# Altium PCB PCB_床头灯_2022-02-08.pcbdoc
Units mm, origin at the board's own origin, x right, y up, seen from the top; angles counter-clockwise.
Board outline 117.85 x 41.75 mm, 2 copper layers (Top Layer, Bottom Layer); 46 components, 36 nets, 195 pads, 215 vias.
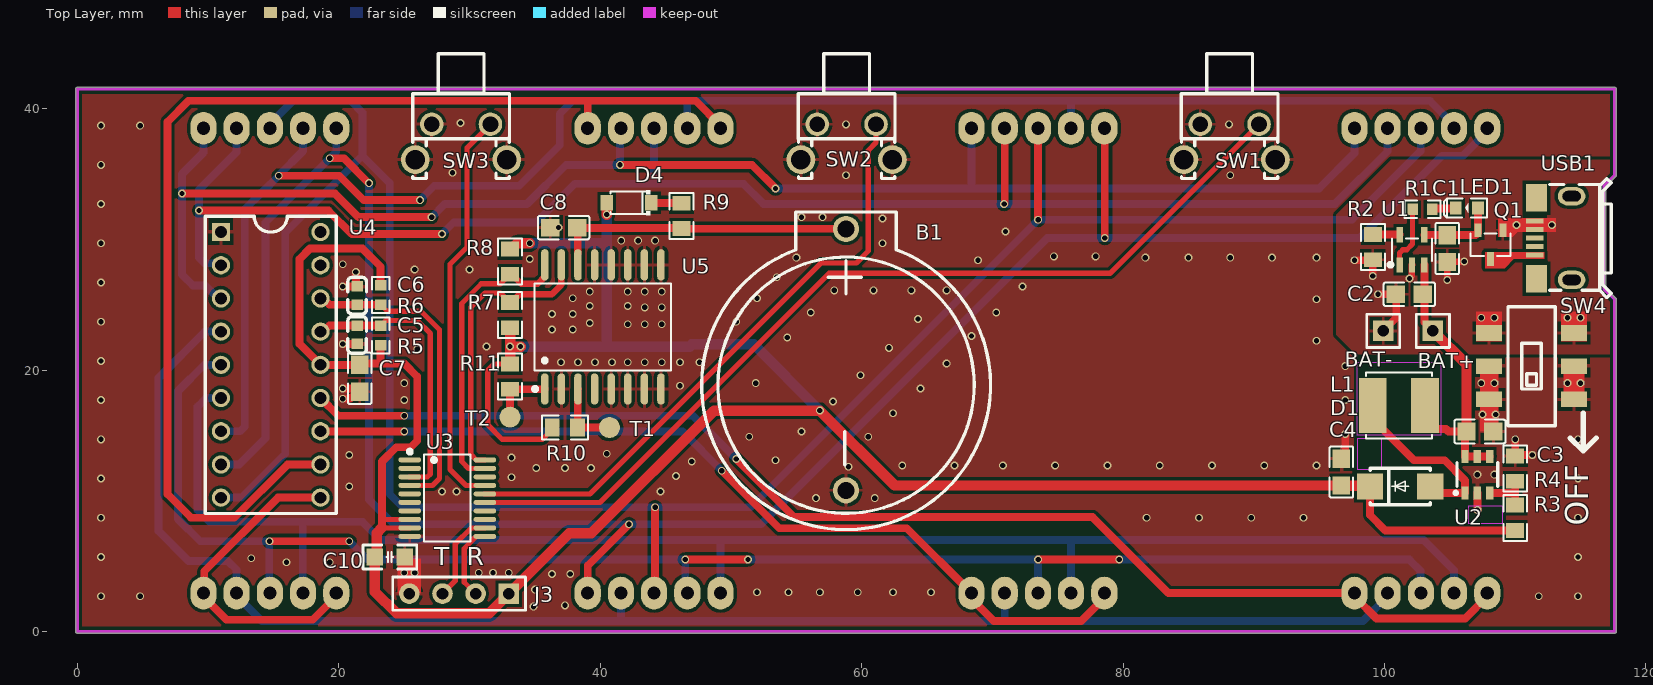
[diagram p0: Top Layer view]
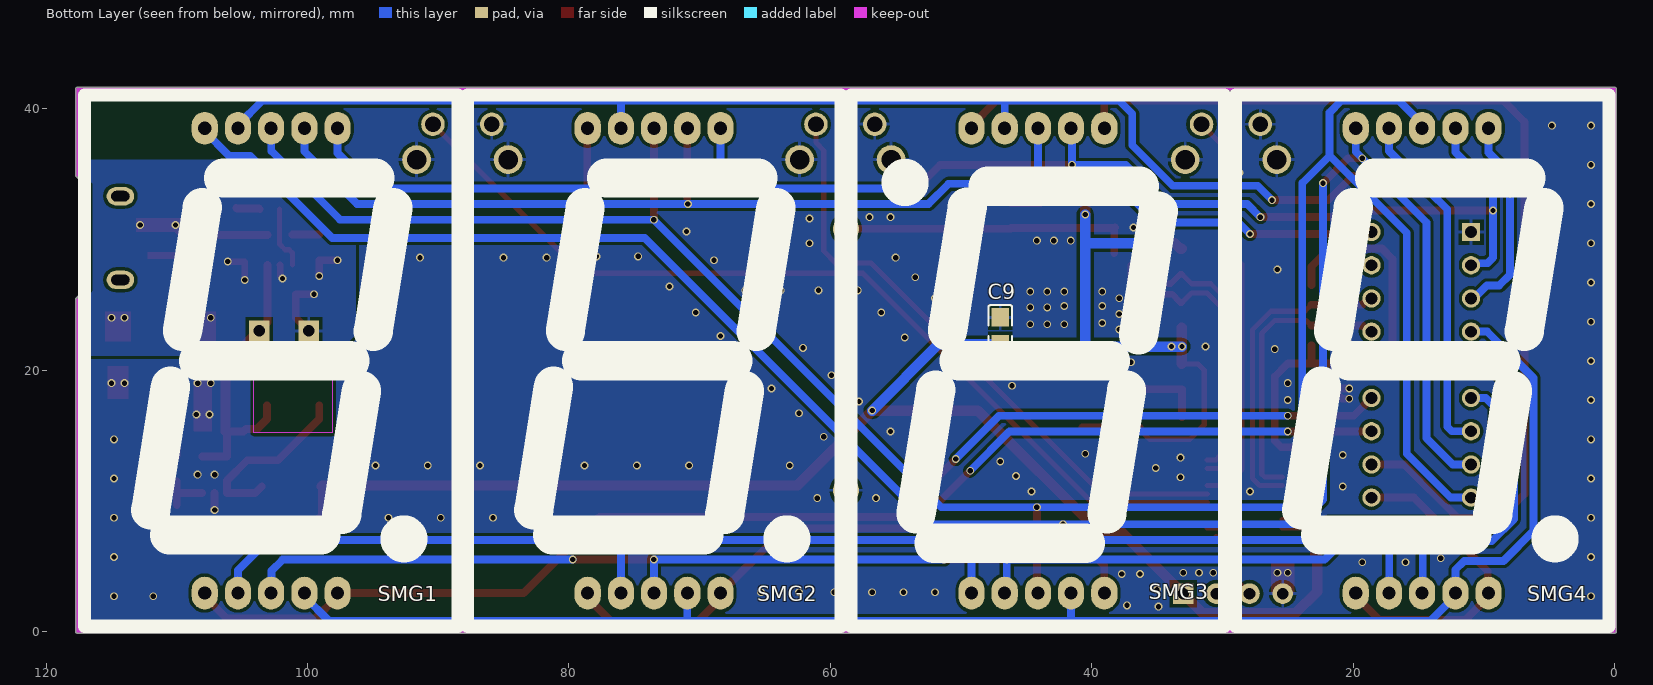
[diagram p1: Bottom Layer view, seen from below]

## Layer stack, top to bottom
Top Solder: solder mask 0.0102, Solder Resist, Dk 3.5
Top Layer: signal copper 0.0356
Dielectric1: dielectric 0.32, FR-4, Dk 4.8
Bottom Layer: signal copper 0.0356
Bottom Solder: solder mask 0.0102, Solder Resist, Dk 3.5

## Board outline
-0.127,0 -0.127,41.5 cw(c0,41.5) 0,41.627 117.6,41.627 cw(c117.6,41.5) 117.727,41.5 117.727,34.9 cw(c117.6,34.9) 117.69,34.81 116.927,34.047 116.927,26.253 117.69,25.49 cw(c117.6,25.4) 117.727,25.4 117.727,0 cw(c117.6,0) 117.6,-0.127 0,-0.127 cw(c0,0)

## Design rules (kind name [scope] priority, off if disabled: settings)
AssemblyTestPointUsage [All] p1 off:
AssemblyTestpoint [All] p1 off: testpointundercomponent=TRUE minsize=1.016 maxsize=2.54 preferedsize=1.524 minholesize=0 maxholesize=1.016 preferedholesize=0.813 testpointgrid=0.025 usegrid=TRUE gridtolerance=0 allowsidetop=TRUE allowsidebottom=TRUE
Clearance [All] p1: gap=0.25 ignorepadtopadclearanceinfootprint=FALSE
ComponentClearance [All] p1 off: gap=0.254 collisioncheckmode=3 verticalgap=0.254 showdistances=FALSE
DiffPairsRouting [All] p1 off: maxlimit=0.254 minlimit=0.254 mostfreqgap=0.254 toplayer_minwidth=0.381 toplayer_maxwidth=0.381 toplayer_prefwidth=0.381 bottomlayer_minwidth=0.381 bottomlayer_maxwidth=0.381 bottomlayer_prefwidth=0.381 maxuncoupledlength=12.7
FabricationTestPointUsage [All] p1 off: valid=0 allowmultiple=FALSE
FabricationTestpoint [All] p1 off: side=3 testpointundercomponent=TRUE minsize=1.016 maxsize=2.54 preferedsize=1.524 minholesize=0 maxholesize=1.016 preferedholesize=0.813 testpointgrid=0.025 allowsidetop=TRUE allowsidebottom=TRUE usegrid=TRUE gridtolerance=0
FanoutControl Fanout_BGA [IsBGA] p1 off: bgadir=Out bgaviamode=Centered fanoutstyle=Auto fanoutdirection=Alternating viagrid=0.025 // Fanout_BGA (Default Rule)
FanoutControl Fanout_LCC [IsLCC] p2 off: bgadir=Out bgaviamode=Centered fanoutstyle=Auto fanoutdirection=Alternating viagrid=0.025 // Fanout_LCC (Default Rule)
FanoutControl Fanout_SOIC [IsSOIC] p3 off: bgadir=Out bgaviamode=Centered fanoutstyle=Auto fanoutdirection=Alternating viagrid=0.025 // Fanout_SOIC (Default Rule)
FanoutControl Fanout_Small [(CompPinCount < 5)] p4 off: bgadir=Out bgaviamode=Centered fanoutstyle=Auto fanoutdirection=OutThenIn viagrid=0.025 // Fanout_Small (Default Rule)
FanoutControl Fanout_Default [All] p5 off: bgadir=Out bgaviamode=Centered fanoutstyle=Auto fanoutdirection=Alternating viagrid=0.025 // Fanout_Default (Default Rule)
Height [All] p1 off: minheight=0 maxheight=25.4 prefheight=12.7
HoleSize [All] p1 off: absolutevalues=TRUE maxlimit=2.54 minlimit=0.025 maxpercent=80.000 minpercent=20.000
HoleToHoleClearance [All] p1 off: gap=0.254 allowstackedmicrovias=TRUE
LayerPairs [All] p1 off: enforce=TRUE
MinimumSolderMaskSliver [All] p1 off: minsoldermaskwidth=0.254
NetAntennae [All] p1 off: netantennaetolerance=0
PasteMaskExpansion [All] p1 off: expansion=0
PlaneClearance [All] p1 off: clearance=0.508
PlaneConnect [All] p1 off: planeconnectstyle=Relief reliefexpansion=0.508 reliefentries=4 reliefconductorwidth=0.254 reliefairgap=0.254
PolygonConnect [All] p1: thpad.connectstyle=Relief thpad.reliefconductorwidth=0.254 thpad.reliefentries=4 thpad.polygonreliefangle="90 Angle" thpad.airgapwidth=0.254 smdpad.connectstyle=Relief smdpad.reliefconductorwidth=0.254 smdpad.reliefentries=4 smdpad.polygonreliefangle="90 Angle" smdpad.airgapwidth=0.254 via.connectstyle=Direct via.reliefconductorwidth=0.254 via.reliefentries=4 via.polygonreliefangle="90 Angle" via.airgapwidth=0.254
RoutingCorners [All] p1 off: cornerstyle=45-Degree minsetback=2.54 maxsetback=2.54
RoutingLayers [All] p1 off: top layer_v5=TRUE bottom layer_v5=TRUE
RoutingPriority [All] p1 off: routingpriority=0
RoutingTopology [All] p1 off: topology=Shortest
RoutingVias [All] p1: holewidth=0.4 width=0.6 viastyle="Through Hole" minholewidth=0.4 minwidth=0.6 maxholewidth=0.4 maxwidth=0.6
ShortCircuit [All] p1 off: allowed=FALSE
SilkToSilkClearance [All] p1 off: silktosilkclearance=0.254
SilkToSolderMaskClearance [IsPad] p1 off: minsilkscreentomaskgap=0.254 clearancetoexposedcopper=TRUE
SolderMaskExpansion [All] p1 off: expansion=0.102 istentingtop=FALSE
UnRoutedNet [All] p1 off:
UnpouredPolygon [All] p1 off:
Width [All] p1: maxlimit=1 minlimit=0.254 preferedwidth=0.6
1 further rules are at their usual default settings.

## Components (designator, comment, footprint, x,y, rotation, side; value= is the part's Value field where it differs from the comment)
B1 "CR2032-BS-2-1" BAT-TH_BS-2-1 58.8,20.8 r180 top
BAT+ "BAT+" HDR-M-2.54_1X1 103.7,23 r0 top (schematic designator J1)
BAT- "BAT-" HDR-M-2.54_1X1 99.9,23 r0 top (schematic designator J2)
C1 "4.7uf" C0805 104.8,29.3 r90 top
C2 "10uf" C0805 101.9,25.8 r0 top
C3 "22uF" C0805 107.3,15.3 r180 top
C4 "22uF" C0805 96.7,12.2 r270 top
C5 "101" C0603 21.4,22.7 r90 top
C6 "101" C0603 21.4,25.7 r90 top
C7 "104" C0805 21.6,19.37 r90 top
C8 "0.1u" C0805 37.2,30.9 r0 top
C9 "0.1u" C0805 47,23 r90 bottom
C10 "22uF" "C 0805_M" 23.9,5.7 r180 top
D1 "SS34" DO-214AC_L4.3-W2.7-LS5.3-RD 101.2,11.1 r0 top
D4 "1N4148W-T4" SOD-123_L2.8-W1.8-LS3.7-RD 42.2,32.8 r180 top
J3 "HDR-M-2.54_1x4" HDR-M-2.54_1X4 29.2,2.9 r180 top
L1 "10uH" IND-SMD_L5.0-W5.0 101.1,17.3 r180 top
LED1 "LED-0603_G" LED0603_GREEN 106.3,32.4 r180 top
Q1 "SI2307" SOT-23-3_L3.0-W1.7-P0.95-LS2.9-BR 108.1,29.6 r90 top
R1 "1k" R0603 102.9,32.3 r0 top
R2 "2k 1%" R0805 99.1,29.4 r90 top
R3 "2k2" R0805 110,8.7 r270 top
R4 "300" R0805 110,12.466 r90 top
R5 "10k" R0603 23.2,22.647 r270 top
R6 "10k" R0603 23.2,25.753 r90 top
R7 "10k" R0805 33.1,24.2 r90 top
R8 "10K" R0805 33.1,28.3 r90 top
R9 "200" R0805 46.2,31.8 r90 top
R10 "10K" R0805 37.3,15.6 r0 top
R11 "10K" R0805 33.1,19.5 r270 top
SMG1 "1.2寸1位" ?#1 102.78,20.72 r180 bottom
SMG2 "1.2寸1位" ?#1 73.48,20.72 r180 bottom
SMG3 "1.2寸1位" ?#1 44.12,20.72 r0 bottom
SMG4 "1.2寸1位" ?#1 14.72,20.72 r180 bottom
SW1 "SET" SW-TH_TC-1102N-C-QL-B 88.15,37.45 r180 top
SW2 "CHANGE" SW-TH_TC-1102N-C-QL-B 58.85,37.45 r180 top
SW3 "MODE" SW-TH_TC-1102N-C-QL-B 29.35,37.45 r180 top
SW4 "SS-3235S-L3" SW-SMD_SS-3235S-L3.00 111.25,20.3 r270 top
T1 "测试点1.2" ?#2 40.7,15.6 r180 top
T2 "测试点1.2" ?#2 33.1,16.4 r180 top
U1 "TP4054_C668215" SOT-23-5_L3.0-W1.7-P0.95-LS2.8-BL 102.1,29.2 r0 top
U2 "SX1308" SOT-23-6_L2.9-W1.6-P0.95-LS2.8-BR 107.1,12 r270 top
U3 "STC8H1K17-36I-TSSOP20" TSSOP-20_L6.5-W4.4-P0.65-LS6.4-BL 28.3,10.2 r270 top
U4 "TM1636" DIP18-2.54-22.8X7.62MM 14.79,20.4 r270 top
U5 "DS3231SN#" SOIC-16_L10.3-W7.5-P1.27-LS10.3-BL 40.2,23.3 r0 top
USB1 "U254-051T-4BH82-S2S" MICRO-USB-SMD_U254-051T-4BH82-S2S 112.9,30.1 r90 top

## Footprints (in the part's own frame and the unit in brackets; to place one, negate y for a bottom-side part, rotate by r counter-clockwise, add the part's x,y. Pads: shape width x height; smd on the part's side, far side on the other; paste and mask are expansions set on the pad)
BAT-TH_BS-2-1 [mm]
  round 2 hole 1.3: 1(0,-10) 2(0,10)
  silkscreen extent -11.05,-11.3 11.04,13
C0603 [mm]
  rect 0.8x0.9 smd: 1(-0.7,0) 2(0.7,0)
  silkscreen extent -1.41,-0.71 1.39,0.72
C0805 [mm]
  rect 1.41x1.35 smd: 1(-1.03,0) 2(1.03,0)
  silkscreen extent -1.96,-0.9 1.96,0.9
"C 0805_M" [mil] "无极性贴片电容"
  rect 50x50 smd: 1(-45,0) 2(45,0)
  silkscreen extent -81,-36 81,36, body extent -39,-24 39,24, height 20
DIP18-2.54-22.8X7.62MM [mm]
  rect 1.4x1.4 hole 0.899: 1(-10.16,-3.81)
  round 1.4 hole 0.899: 2(-7.62,-3.81) 3(-5.08,-3.81) 4(-2.54,-3.81) 5(0,-3.81) 6(2.54,-3.81) 7(5.08,-3.81) 8(7.62,-3.81) 9(10.16,-3.81) 10(10.16,3.81) 11(7.62,3.81) 12(5.08,3.81) 13(2.54,3.81) 14(0,3.81) 15(-2.54,3.81) 16(-5.08,3.81) 17(-7.62,3.81) 18(-10.16,3.81)
  silkscreen extent -11.38,-5 11.38,5
DO-214AC_L4.3-W2.7-LS5.3-RD [mm]
  rect 2x2 smd: 1(-2.3,0) 2(2.3,0)
  silkscreen extent -2.3,-1.4 2.3,1.4
HDR-M-2.54_1X1 [mil]
  rect 62x62 hole 35: 1(0,0)
  silkscreen extent -50,-50 50,50
HDR-M-2.54_1X4 [mil]
  rect 62x62 hole 35: 1(-150,0)
  round 62 hole 35: 2(-50,0) 3(50,0) 4(150,0)
  silkscreen extent -200,-50 200,50
IND-SMD_L5.0-W5.0 [mm]
  rect 2.124x4.22 smd: 1(2,0) 2(-2,0)
  silkscreen extent -2.53,-2.53 2.53,2.53
LED0603_GREEN [mm]
  rect 0.9x1 smd: 1(-0.85,0) 2(0.85,0)
  silkscreen extent -1.54,-0.73 1.75,0.73
MICRO-USB-SMD_U254-051T-4BH82-S2S [mm]
  rect 0.4x1.35 smd: 1(-1.3,1.413) 2(-0.65,1.413) 3(0,1.413) 4(0.65,1.413) 5(1.3,1.413)
  rect 2.1x1.6 smd: 6(3.1,1.288) 9(-3.1,1.288)
  oval 1.4x2.1 hole 0.8 slot 1.4 at 90 deg: 7(3.2,-1.412) 8(-3.2,-1.412)
  silkscreen extent -4.55,-4.44 4.55,0.26
R0603 [mm]
  rect 0.806x0.864 smd: 1(-0.753,0) 2(0.753,0)
  silkscreen extent -1.39,-0.66 1.39,0.66
R0805 [mm]
  rect 1.133x1.377 smd: 1(-0.966,0) 2(0.966,0)
  silkscreen extent -1.76,-0.92 1.76,0.92
SOD-123_L2.8-W1.8-LS3.7-RD [mm]
  rect 0.95x1.15 smd: 1(-1.693,0) 2(1.693,0)
  silkscreen extent -1.63,-0.94 1.41,0.94
SOIC-16_L10.3-W7.5-P1.27-LS10.3-BL [mm]
  oval 0.574x2.401 smd: 1(-4.445,-4.75) 2(-3.175,-4.75) 3(-1.905,-4.75) 4(-0.635,-4.75) 5(0.635,-4.75) 6(1.905,-4.75) 7(3.175,-4.75) 8(4.445,-4.75) 9(4.445,4.75) 10(3.175,4.75) 11(1.905,4.75) 12(0.635,4.75) 13(-0.635,4.75) 14(-1.905,4.75) 15(-3.175,4.75) 16(-4.445,4.75)
  silkscreen extent -5.33,-4.9 5.23,3.32
SOT-23-3_L3.0-W1.7-P0.95-LS2.9-BR [mm]
  rect 1.037x0.532 smd: 1(1.101,-0.95) 2(1.101,0.95) 3(-1.101,0)
  silkscreen extent -0.86,-1.53 0.86,1.53
SOT-23-5_L3.0-W1.7-P0.95-LS2.8-BL [mm]
  rect 0.49x1.157 smd: 1(-0.95,-1.154) 2(0,-1.154) 3(0.95,-1.154)
  rect 0.49x1.175 smd: 4(0.95,1.154) 5(-0.95,1.154)
  silkscreen extent -1.8,-1.29 1.53,0.85
SOT-23-6_L2.9-W1.6-P0.95-LS2.8-BR [mm]
  rect 1x0.55 smd: 1(1.4,-0.95) 2(1.4,0) 3(1.4,0.95) 4(-1.4,0.95) 5(-1.4,0) 6(-1.4,-0.95)
  silkscreen extent -0.9,-1.78 1.52,1.55
SW-SMD_SS-3235S-L3.00 [mm]
  rect 1.2x2 smd: 1(-2.54,3.25) 2(0,3.25) 3(2.54,3.25) 4(-2.54,-3.25) 5(0,-3.25) 6(2.54,-3.25)
  silkscreen extent -4.55,-1.8 4.55,1.8
SW-TH_TC-1102N-C-QL-B [mm]
  round 1.8 hole 1.2: 1(-2.25,-1.35) 2(2.25,-1.35)
  round 2.2 hole 1.5: 3(-3.5,1.35) 4(3.5,1.35)
  silkscreen extent -3.7,-6.75 3.7,2.79
TSSOP-20_L6.5-W4.4-P0.65-LS6.4-BL [mm]
  oval 0.364x1.742 smd: 1(-2.925,-2.871) 2(-2.275,-2.871) 3(-1.625,-2.871) 4(-0.975,-2.871) 5(-0.325,-2.871) 6(0.325,-2.871) 7(0.975,-2.871) 8(1.625,-2.871) 9(2.275,-2.871) 10(2.925,-2.871) 11(2.925,2.871) 12(2.275,2.871) 13(1.625,2.871) 14(0.975,2.871) 15(0.325,2.871) 16(-0.325,2.871) 17(-0.975,2.871) 18(-1.625,2.871) 19(-2.275,2.871) 20(-2.925,2.871)
  silkscreen extent -3.71,-3.02 3.33,1.77
?#1 [mm]
  oval 2x2.5 hole 1: 1(-5.08,-17.78) 2(-2.54,-17.78) 3(0,-17.78) 4(2.54,-17.78) 5(5.08,-17.78) 6(5.08,17.78) 7(2.54,17.78) 8(0,17.78) 9(-2.54,17.78) 10(-5.08,17.78)
  silkscreen extent -14.29,-20.32 14.29,20.32
?#2 [mm]
  round 1.6 smd: 1(0,0)

## Part data
B1: BOM_JLCPCB Part Class="Extended Part", BOM_Manufacturer=Q&J, BOM_Manufacturer Part=BS-2-1, BOM_Supplier=LCSC, BOM_Supplier Part=C70376, spicePre=B, spiceSymbolName=CR2032-BS-2-1
C3 C4 C10: BOM_JLCPCB Part Class="Extended Part", BOM_Manufacturer="Samsung Electro-Mechanics", BOM_Manufacturer Part=CL21A226MAYNNNE, BOM_Supplier=LCSC, BOM_Supplier Part=C602037, Contributor=LCSC, nameAlias=Capacitance, spicePre=C, spiceSymbolName=CL21A226MAYNNNE
D1: BOM_JLCPCB Part Class="Basic Part", BOM_Manufacturer=MDD, BOM_Manufacturer Part=SS34, BOM_Supplier=LCSC, BOM_Supplier Part=C8678, spicePre=D, spiceSymbolName=SS34_C8678
D4 Q1: BOM_JLCPCB Part Class="Extended Part", BOM_Manufacturer="Guangdong Hottech", BOM_Supplier=LCSC, Contributor=LCSC
  D4: BOM_Manufacturer Part=1N4148W-T4, BOM_Supplier Part=C181134, spicePre=D, spiceSymbolName=1N4148W-T4
  Q1: BOM_Manufacturer Part=SI2307, BOM_Supplier Part=C189813, spicePre=Q, spiceSymbolName=SI2307
L1: BOM_JLCPCB Part Class="Extended Part", BOM_Manufacturer="PROD Tech", BOM_Manufacturer Part=PSPNAQ5040-100M, BOM_Supplier=LCSC, BOM_Supplier Part=C436710, Contributor=LCSC, nameAlias=Inductance, spicePre=L, spiceSymbolName=PSPNAQ5040-100M
LED1: BOM_Manufacturer=EVERLIGHT(台湾亿光), BOM_Manufacturer Part=19-217/GHC-YR1S2/3T, BOM_Supplier=LCSC, BOM_Supplier Part=C72043, Contributor=LCEDA_Lib, spicePre=L, spiceSymbolName=LED-0603_G
SW1 SW2 SW3: BOM_JLCPCB Part Class="Extended Part", BOM_Manufacturer="XKB Enterprise", BOM_Manufacturer Part=TC-1102N-C-QL-B, BOM_Supplier=LCSC, BOM_Supplier Part=C406155, Contributor=LCSC, spicePre=S, spiceSymbolName=TC-1102N-C-QL-B
SW4: BOM_JLCPCB Part Class="Extended Part", BOM_Manufacturer="XKB Enterprise", BOM_Manufacturer Part=SS-3235S-L3, BOM_Supplier=LCSC, BOM_Supplier Part=C381098, Contributor=LCSC, spicePre=S, spiceSymbolName=SS-3235S-L3
U1: BOM_JLCPCB Part Class="Extended Part", BOM_Manufacturer="UMW(Youtai Semiconductor Co., Ltd.)", BOM_Manufacturer Part=TP4054, BOM_Supplier=LCSC, BOM_Supplier Part=C668215, Contributor=LCSC, spicePre=U, spiceSymbolName=TP4054_C668215
U2: BOM_JLCPCB Part Class="Extended Part", BOM_Manufacturer=SX, BOM_Manufacturer Part=SX1308, BOM_Supplier=LCSC, BOM_Supplier Part=C78162, sourceId=g4Yg9rJ1j, spicePre=U, spiceSymbolName=SX1308, timeStamp=1472247539
U3: BOM_JLCPCB Part Class="Extended Part", BOM_Manufacturer="STC Micro", BOM_Manufacturer Part=STC8H1K17-36I-TSSOP20, BOM_Supplier=LCSC, BOM_Supplier Part=C915675, Contributor=LCSC, spicePre=U, spiceSymbolName=STC8H1K17-36I-TSSOP20
U5: BOM_JLCPCB Part Class="Extended Part", BOM_Manufacturer=MAXIM, BOM_Manufacturer Part=DS3231SN, BOM_Supplier=LCSC, BOM_Supplier Part=C9866, image=http://image.lceda.cn/szlcsc/C9866.jpg, spicePre=U, spiceSymbolName=DS3231SN#, subpart_no=1, tags=Clock
USB1: BOM_JLCPCB Part Class="Extended Part", BOM_Manufacturer="XKB Connectivity(中国星坤)", BOM_Manufacturer Part=U254-051T-4BH82-S2S, BOM_Supplier=LCSC, BOM_Supplier Part=C908456, Contributor=LCSC, spicePre=U, spiceSymbolName=U254-051T-4BH82-S2S
BAT+ BAT-: BOM_Supplier=LCSC, BOM_Supplier Part=C81276, Contributor=LCEDA_Lib, spicePre=J, spiceSymbolName=HDR-M-2.54_1x1
C1 C2 C7 C8 C9: Contributor=LCEDA_Lib, nameAlias=Value(F), spicePre=C, spiceSymbolName=C_0805_US
C5 C6: Contributor=LCEDA_Lib, nameAlias=Value(F), spicePre=C, spiceSymbolName=C_0603_US
J3: BOM_Supplier=LCSC, BOM_Supplier Part=C124378, Contributor=LCEDA_Lib, spicePre=J, spiceSymbolName=HDR-M-2.54_1x4
R1 R5 R6: Contributor=LCEDA_Lib, nameAlias=Value(Ω), spicePre=R, spiceSymbolName=R_0603_US
R2 R3 R4 R7 R8 R9 R10 R11: Contributor=LCEDA_Lib, nameAlias=Value(Ω), spicePre=R, spiceSymbolName=R_0805_US
SMG1 SMG2 SMG3 SMG4: Contributor=gefyyg, spicePre=S, spiceSymbolName=1.2寸1位-10
T1 T2: BOM_Supplier Part=undefined, Contributor=Wang233_CN, spicePre=T, spiceSymbolName=测试点1.2, subpart_no=1
U4: BOM_Manufacturer Part=TM1636, sourceId=EwIigPpnz, spicePre=U, spiceSymbolName=TM1636, timeStamp=1448004853

## Via types
v1: diameter 0.6, hole 0.4, Top Layer to Bottom Layer, tented both sides, 212 vias
v2: diameter 0.6, hole 0.4, Top Layer to Bottom Layer, 3 vias

## Nets (pads, with @x,y where several pads share a name; then routed paths per layer and width w, separated by ;. In a path a pad name is that pad's centre, name@x,y a point inside that pad or via, vN(x,y) a via of type N, cw(c..) or ccw(c..) an arc to the next point about the centre after c; other vN are vias at no path point)
+5V: Q1.3 USB1.1
A: SMG1.7 SMG2.7 SMG3.3 SMG4.7 U4.2 | length 120.4
  Top Layer w0.6: v1(9.3,32.2) 19.2,32.2 21,30.4 v1(27.9,30.4) ; v1(70.9,32.7) 70.94,32.74 SMG2.7
  Bottom Layer w0.6: U4.2 10.827,28.173 9.727,28.173 9.3,28.6 9.3,33.8 12.18,36.68 SMG4.7 ; v1@27.918,30.418 28.8,31.3 35.1,31.3 38.05,34.25 44.1,34.25 50.95,34.25 52.5,32.7 v1(70.9,32.7) 96.2,32.7 100.24,36.74 SMG1.7 ; 44.1,34.3 44.1,38.48 SMG3.3
B: SMG1.6 SMG2.6 SMG3.2 SMG4.6 U4.3 | length 118.9
  Top Layer w0.6: v1(8,33.5) 19.7,33.5 21.5,31.7 v1(27.1,31.7) ; v1(41.5,35.7) 51.6,35.7 v1(53.4,33.9)
  Bottom Layer w0.6: SMG4.6 9.64,36.64 8,35 8,27.3 8.818,26.482 9.762,26.482 10.764,25.48 U4.3 ; v1(27.1,31.7) 28.1,32.7 34.4,32.7 37.4,35.7 v1(41.5,35.7) 41.5,38.42 SMG3.2 ; v1(53.4,33.9) 68.4,33.9 ; SMG2.6 68.4,33.9 ; SMG1.6 97.7,36.6 95,33.9 68.4,33.9
BAT+: BAT+.1 C2.2 C3.2 L1.2 U1.3 U2.4 U2.5 U2.6 | length 22.5
  Top Layer w0.6: U1.3 103.046,28.042 103.046,25.8 103.046,23.654 BAT+.1 ; L1.2 103.1,16.252 103.862,15.49 104.71,15.49 104.9,15.3 C3.2 106.15,15.18 U2.6 U2.5 U2.4
  Top Layer w0.8: BAT+.1 106.27,20.43 106.27,15.689 C3.2
BGND: BAT-.1 C1.1 C2.1 Q1.1 R2.1 SW4.1 SW4.4 U1.2 USB1.4 USB1.5 | length 11
  Top Layer w0.5: v1(101.9,27) 101.9,27.027 102.095,27.222 102.095,28.041 U1.2 ; v1(104.8,26.9) C1.1 104.815,28.285 106.085,28.285 v1(106.1,28.3)
  Top Layer w0.6: v1(97.7,28.4) 99.066,28.4 99.1,28.366 v1(99.1,27.2) ; v1(99.5,25.8) C2.1 100.9,25.77 100.9,24 BAT-.1
  other v1: 107.4,24 108.4,24 114,24 115,24 110.1,31.1 112.8,31.1
C: SMG1.4 SMG2.4 SMG3.9 SMG4.4 U4.4 | length 121.1
  Bottom Layer w0.6: U4.4 9.74,22.94 6.2,19.4 6.2,7.7 8.5,5.4 11.5,5.4 12.18,4.72 SMG4.4 12.18,2.72 14.1,0.8 41.6,0.8 98.35,0.8 100.24,2.69 SMG1.4 ; SMG3.9 41.58,0.92 41.6,0.9 ; 70.94,0.96 SMG2.4
D: SMG1.3 SMG2.3 SMG3.7 SMG4.3 U4.5 | length 121.5
  Top Layer w0.6: v1(14.7,6.9) v1(20.8,6.9) ; v1(46.5,5.5) v1(51.3,5.5) ; v1(73.5,5.5) v1(79.7,5.5)
  Bottom Layer w0.6: U4.5 9.7,20.4 7.7,18.4 7.7,8.6 9.4,6.9 v1(14.7,6.9) 14.672,6.872 14.672,2.989 SMG4.3 ; v1(20.8,6.9) 22.2,5.5 v1(46.5,5.5) 46.5,3.1 SMG3.7 ; v1(51.3,5.5) v1(73.5,5.5) 73.5,2.96 SMG2.3 ; v1(79.7,5.5) 101.9,5.5 102.752,4.648 102.752,2.968 SMG1.3
DP: SMG1.8 SMG2.8 SMG3.8 SMG4.8 U4.9 | length 176
  Top Layer w0.6: SMG3.8@44.2,3 v1(44.2,9.5) ; SMG2.8 73.48,31.52 v1(73.5,31.5)
  Bottom Layer w0.6: U4.9 12.54,10.24 15.9,13.6 15.9,30.5 21.8,36.4 ; SMG4.8 14.72,38.82 16.5,40.6 20.9,40.6 21.8,39.7 21.8,36.4 ; SMG1.8 102.772,38.492 102.772,36.772 97.5,31.5 v1(73.5,31.5) v1(73.5,31.5) 51.502,9.5 v1(44.2,9.5) 24.9,9.5 23.9,10.5 23.9,34.3 21.8,36.4
E: SMG1.2 SMG2.2 SMG3.6 SMG4.2 U4.6 | length 123.3
  Bottom Layer w0.6: U4.6 9.86,17.86 9.2,17.2 9.2,9.3 10.1,8.4 17.242,8.4 ; SMG4.2 17.242,2.959 17.242,8.4 ; SMG3.6 49.2,7 ; SMG2.2 76.02,7 ; SMG1.2 105.32,4.68 103,7 76.02,7 ; 17.242,8.4 21.8,8.4 23.2,7 49.2,7 ; 49.2,7 76.02,7
F: SMG1.9 SMG2.9 SMG3.4 SMG4.9 U4.7 | length 127.2
  Top Layer w0.6: v1(15.4,34.867) 20.033,34.867 21.9,33 v1(26.2,33)
  Bottom Layer w0.6: U4.7 12.449,15.32 12.8,15.671 12.8,32.3 14.083,33.583 14.117,33.583 v1(15.4,34.867) 15.4,34.9 17.26,36.76 SMG4.9 ; v1(26.2,33) 27.3,34.1 33.8,34.1 36.9,37.2 36.9,39.6 37.9,40.6 46.66,40.6 ; SMG3.4 46.66,40.6 ; SMG2.9 76.02,40.52 76.1,40.6 ; SMG1.9 105.32,38.75 103.47,40.6 76.1,40.6 ; 46.66,40.6 76.1,40.6
G: SMG1.10 SMG2.10 SMG3.10 SMG4.10 U4.8 | length 172.2
  Top Layer w0.6: v1(19.3,36.2) 20.4,36.2 v1(22.3,34.3) ; SMG3.10 39.04,5.04 v1(42.2,8.2) ; SMG2.10 78.6,38.46 v1(78.6,30.1)
  Bottom Layer w0.6: U4.8 12.38,12.78 14.4,14.8 14.4,31.3 v1(19.3,36.2) 19.8,36.7 SMG4.10 ; v1(22.3,34.3) 22.3,10.1 24.2,8.2 v1(42.2,8.2) 52.3,8.2 74.2,30.1 v1(78.6,30.1) 98.1,30.1 104.4,36.4 106,36.4 107.86,38.26 SMG1.10
G1: SMG1.1 SMG1.5 U4.13 | length 97
  Top Layer w0.6: U4.13 19.96,16.5 v1(25,16.5) ; v1(50.4,13.2) 54.85,8.75 77.652,8.75 83.462,2.94 SMG1.5 ; SMG1.5@97.8,2.69 97.8,2.59 99.39,1 106.17,1 107.86,2.69 SMG1.1
  Bottom Layer w0.6: v1(25,16.5) 47.1,16.5 v1(50.4,13.2)
G2: SMG2.1 SMG2.5 U4.12 | length 67.3
  Top Layer w0.6: U4.12 18.62,15.3 v1(25,15.3) ; v1(49.3,12.3) 53.7,7.9 63.44,7.9 SMG2.5 68.4,2.5 70.1,0.8 76.8,0.8 78.56,2.56 SMG2.1
  Bottom Layer w0.6: v1(25,15.3) 46.3,15.3 v1(49.3,12.3)
G3: SMG3.1 SMG3.5 U4.11 | length 88.7
  Top Layer w0.6: U4.11 16.08,12.78 12,8.7 8.7,8.7 6.9,10.5 6.9,39 8.5,40.6 39,40.6 ; SMG3.1 39.04,40.56 39,40.6 ; SMG3.5 49.2,38.7 47.3,40.6 39,40.6
G4: SMG4.1 SMG4.5 U4.10 | length 25.1
  Top Layer w0.6: U4.10 15.34,10.24 9.709,4.609 9.709,3.008 SMG4.5 9.64,2.66 11.4,0.9 18,0.9 19.8,2.7 SMG4.1
GND: B1.2 C3.1 C4.1 C5.1 C6.2 C7.1 C8.1 C9.2 C10.1 J3.4 R4.2 SW1.2 SW1.3 SW1.4 SW2.2 SW2.3 SW2.4 SW3.2 SW3.3 SW3.4 SW4.2 SW4.3 SW4.5 SW4.6 U2.2 U3.10 U4.1 U5.2 U5.5 U5.6 U5.7 U5.8 U5.9 U5.10 U5.11 U5.12 U5.13 | length 12.4
  Top Layer w0.6: v1(20.3,17.8) 20.874,17.8 21.009,17.935 21.225,17.935 21.6,18.31 C7.1 21.34,18.6 v1(20.3,18.6) ; v1(20.3,22) C5.1@21.4,22 ; v1(20.3,26.4) 21.4,26.4 21.3,26.5 v1(21.3,27.5) ; SW3.3@32.85,35.94 SW3.3 ; C4.1@96.77,13.3 C4.1 97,13.53 v1(97,15.1) ; v1(107.1,9.3) U2.2 ; v1(110,14.7) R4.2 110.067,13.5 v1(111.3,13.5)
  other v1: 34.9,1.9 37.3,2 1.8,2.7 4.8,2.7 111.8,2.7 114.8,2.7 52,3 54.4,3 56.8,3 59.7,3 62.4,3 65.3,3 35,3.2 36.3,4.4 37.7,4.4 25,4.5 25.8,4.5 30.7,4.5 31.8,4.5 33,4.5 16,5.3 19.3,5.3 13.3,5.6 1.8,5.7 114.8,5.7 1.8,8.7 81.8,8.7 85.8,8.7 89.8,8.7 93.8,8.7 114.8,8.7 56.5,10.2 61,10.2 27.9,10.7 29,10.7 44.6,10.7 20.8,11.1 1.8,11.7 114.8,11.7 33.2,11.8 45.8,11.9 107.1,12 108.4,12 35.1,12.5 37.3,12.5 39.3,12.5 59,12.6 63.1,12.7 67.1,12.7 70.8,12.7 74.8,12.7 78.8,12.7 82.8,12.7 86.8,12.7 90.8,12.7 94.8,12.7 47,13 53.4,13.1 33.2,13.3 20.8,13.5 40.5,13.6 1.8,14.7 114.8,14.7 51.4,14.9 60.5,14.9 55.4,15.3 107.5,16.6 108.5,16.6 62.4,16.7 57.8,17.6 1.8,17.7 25,17.7 97,17.7 64.5,18.6 46.1,18.8 25,19 51.9,19 107.4,19 108.4,19 114,19 115,19 59.9,19.6 97,20.3 66.5,20.5 37,20.6 38.3,20.6 39.6,20.6 40.9,20.6 42.1,20.6 43.4,20.6 44.7,20.6 46.1,20.6 47.6,20.6 1.8,20.7 26,21.6 62.1,21.7 31.3,21.8 94.8,22.24 54.3,22.5 68.4,22.6 36.3,23.1 37.9,23.1 42.1,23.5 43.4,23.5 44.7,23.5 39.2,23.6 1.8,23.7 50.4,23.7 64.3,23.9 36.3,24.3 37.9,24.3 56.1,24.4 70.3,24.4 43.4,24.8 44.7,24.8 39.2,24.9 42.1,24.9 94.8,25.42 37.9,25.5 52,25.5 39.2,26 42.1,26 43.4,26 44.7,26 57.9,26.1 60.9,26.1 63.8,26.1 66.5,26.1 72.3,26.4 1.8,26.7 53.5,27.1 25.8,27.7 30,27.7 20.3,28.1 68.9,28.4 34.6,28.5 55,28.6 81.7,28.6 85,28.6 88.2,28.6 91.4,28.6 94.8,28.6 74.7,28.7 77.9,28.7 1.8,29.7 61.6,29.7 41.6,29.9 42.9,29.9 44.2,29.9 71,30.6 36.8,30.9 61.6,31.6 55.4,31.7 57,31.7 1.8,32.7 58.8,34.9 88.2,34.9 28.7,35.1 1.8,35.7 1.8,38.7 4.8,38.7 58.8,38.8 88.1,38.8 29.3,38.9
NetB1_1: B1.1 C8.2 R9.1 U5.14 | length 22.6
  Top Layer w0.6: U5.14@38.282,28.951 38.282,30.848 C8.2 38.263,30.867 46.167,30.867 46.217,30.817 58.783,30.817 B1.1
NetC1_2: C1.2 LED1.1 Q1.2 U1.4 | length 6.1
  Top Layer w0.6: U1.4 103.062,30.342 104.788,30.342 C1.2 106.963,30.33 107.15,30.516 Q1.2 LED1.1
NetC5_2: C5.2 R5.1 U3.3 U4.15 | length 21.6
  Top Layer w0.4: R5.1 23.6,23.8 26,23.8 27,22.8 27,12.059 26.766,11.825 U3.3
  Top Layer w0.6: U4.15 18.816,22.94 19.276,23.4 C5.2 R5.1
NetC6_1: C6.1 R6.1 U3.4 U4.16 | length 24
  Top Layer w0.4: R6.1 23.7,24.5 26.29,24.5 27.7,23.09 27.7,11.7 27.175,11.175 U3.4
  Top Layer w0.6: U4.16 18.816,25.48 19.296,25 C6.1 R6.1
NetD1_2: D1.2 L1.1 U2.1 | length 13.9
  Top Layer w0.6: L1.1 99.1,16.252 102.252,13.1 104.6,13.1 106.15,11.55 U2.1 104,10.6 D1.2
NetD4_1: D4.1 R9.2 | length 2.3
  Top Layer w0.6: D4.1 43.909,32.783 46.183,32.783 R9.2
NetJ3_2: J3.2 U3.11 | length 5.1
  Top Layer w0.4: J3.2 29.6,3.77 29.6,6.357 U3.11@30.5,7.257
NetJ3_3: J3.3 U3.12 | length 7
  Top Layer w0.4: J3.3 28.9,3.87 28.9,6.7 30.125,7.925 U3.12
NetLED1_2: LED1.2 R1.2 | length 1.8
  Top Layer w0.6: R1.2 103.703,32.35 105.4,32.35 LED1.2
NetR1_1: R1.1 U1.1 | length 4.8
  Top Layer w0.4: U1.1 101.15,28.95 101.4,29.2 101.7,29.2 102.147,29.647 R1.1
NetR2_2: R2.2 U1.5 | length 2.1
  Top Layer w0.6: R2.2 99.106,30.36 101.144,30.36 U1.5
NetR3_1: R3.1 R4.1 U2.3 | length 3.8
  Top Layer w0.6: U2.3 109.983,10.6 110,10.583 ; R3.1 110,10.583 ; R4.1 110,10.583
NetR7_2: R7.2 U3.20 U5.15 | length 22.3
  Top Layer w0.4: U3.20 30.518,13.125 30.1,13.543 30.1,24.81 31.19,25.9 32.366,25.9 R7.2
  Top Layer w0.5: R7.2 33.222,25.166 33.539,25.483 33.539,25.507 33.831,25.8 36.3,25.8 37.011,26.511 37.011,28.036 U5.15
NetR8_1: R8.1 U3.19 U5.16 | length 22.8
  Top Layer w0.4: U3.19 29.925,12.475 29.4,13 29.4,25.1 30.9,26.6 32.366,26.6 R8.1
  Top Layer w0.5: R8.1 33.222,27.334 33.956,26.6 35.218,26.6 35.731,27.113 35.731,28.026 U5.16
NetR10_2: R10.2 T1.1 U5.3 | length 5.4
  Top Layer w0.6: U5.3 38.282,18.537 38.282,15.616 R10.2 T1.1
NetR11_2: R11.2 T2.1 U5.1 | length 4.8
  Top Layer w0.6: T2.1 R11.2 35.742,18.534 35.755,18.547 U5.1
NetSW1_1: SW1.1 U3.15 | length 71.2
  Top Layer w0.4: U3.15 39.975,9.875 57.5,27.4 79,27.4 SW1.1
NetSW2_1: SW2.1 U3.16 | length 47
  Top Layer w0.4: U3.16 39.225,10.525 56.9,28.2 59.6,28.2 60.5,29.1 60.5,36.8 61.1,37.4 SW2.1
NetSW3_1: SW3.1 U3.17 | length 30.9
  Top Layer w0.4: U3.17 29.725,11.175 28.5,12.4 28.5,28.1 29.8,29.4 29.8,37 SW3.1
VCC: C4.2 C7.2 C9.1 C10.2 D1.1 D4.2 J3.1 R3.2 R5.2 R6.2 R7.1 R8.2 R10.1 R11.1 U3.8 U3.9 U4.14 | length 208
  Top Layer w0.4: 23.3,7.925 U3.9 ; 23.4,8.575 U3.8 ; R11.1@33.097,20.463 31.863,20.463 31.4,20 31.4,15.8 32.5,14.7 35.556,14.7 R10.1@36.334,15.478
  Top Layer w0.6: 23.2,20.751 R5.2 ; R6.2 23.2,27.9 21.8,29.3 17.8,29.3 17,28.5 17,22 U4.14 C7.2 21.7,20.5 23.2,20.5 25,20.5 26,19.5 26,14.6 25.5,14.1 24.4,14.1 23.3,13 23.3,8.575 23.3,8.2 ; R11.1@33.097,20.463 R11.1 ; R10.1@36.334,15.478 R10.1 ; D1.1 98.9,8.9 100.066,7.734 R3.2
  Top Layer w0.8: 23.3,7.925 22.89,7.515 22.89,5.833 C10.2 22.757,5.472 22.75,5.465 22.75,3.05 24.419,1.381 31.491,1.381 J3.1 37.61,7.5 39.3,7.5 48.7,16.9 v2(56.8,16.9) 62.53,11.17 C4.2 96.735,11.135 98.865,11.135 D1.1 ; R11.1 v1(33.1,21.8) ; R7.1 v1(33.1,21.8) ; R8.2 33.222,29.266 33.656,29.7 v2(34.6,29.7) ; v1(33.9,21.8) v1(33.1,21.8) ; v2(40.5,31.9) 40.5,32.793 D4.2
  Bottom Layer w0.8: v1(33.1,21.8) 40.5,21.8 ; v2(34.6,29.7) 40.4,29.7 40.5,29.6 ; v2(40.5,31.9) 40.5,29.6 ; v2(56.8,16.9) 51.73,21.97 C9.1 46.83,21.8 40.5,21.8 ; 40.5,21.8 40.5,29.6
pads on no net: U3.1 U3.2 U3.5 U3.6 U3.7 U3.13 U3.14 U3.18 U4.17 U4.18 U5.4 USB1.2 USB1.3 USB1.6 USB1.7 USB1.8 USB1.9

## Polygon pours and split planes (outlines as drawn)
GND on Bottom Layer "NONET_L-01_P-001" (solid, remove dead copper, pour order 2): 0,41.5 0,0 117.6,0 117.6,41.5
BGND on Bottom Layer "NONET_L-01_P-001" (solid, remove dead copper, pour order 0): 117.6,36.1 117.6,34.9 116.8,34.1 116.8,26.2 117.6,25.4 117.6,21.1 97.9,21.1 96.3,22.7 96.3,31.9 100.5,36.1
GND on Top Layer "NONET_L-01_P-001" (solid, remove dead copper, pour order 4): 0,41.5 0,0 117.6,0 117.6,41.5
BGND on Top Layer "NONET_L-01_P-001" (solid, remove dead copper, pour order 1): 117.6,36.1 117.6,34.9 116.8,34.1 116.8,26.2 117.6,25.4 117.6,21.2 97.8,21.2 96.3,22.7 96.3,31.9 100.5,36.1

## Keep-outs
Top Layer:
  rectangle: 106.4,8.295 109.061,9.6
  rectangle: 97.9,12.4 99.8,14.745
  region: 97.9,20.6 104.3,20.6 104.3,15 97.9,15
Bottom Layer:
  region: 98.1,19.4 98.1,15.2 104.1,15.2 104.1,19.4
Keep-Out Layer:
  lines w0.254: 0,0 0,41.5 117.6,41.5 117.6,34.9 116.8,34.1 116.8,26.2 117.6,25.4 117.6,0 0,0

## Other copper
Top Layer:
  rectangle net GND: 24.5,2.9 26.3,5.6
  rectangle net GND: 113.7,17.8 115.3,20.3
  rectangle net GND: 107.3,15.3 108.7,20.3
  rectangle net BGND: 113.5,22.2 115.5,24.5
  rectangle net BGND: 107,22.2 109,24.5
  region net +5V: 107.7,29 107.7,27.8 109.2,27.8 109.9,28.5 112.2,28.5 112.2,29
  region net BGND: 108.7,31.6 108.7,30.2 109.8,30.2 110.2,30.6 113.1,30.6 113.1,31.6

## Silkscreen, mask and mechanical layers (free items; w line width, h text height)
Top Overlay:
  lines w0.4: 114.2,14.8 115.2,13.8 ; 115.2,16.7 115.2,13.8 ; 116.2,14.8 115.2,13.8 ; 115.2,13.8 115.2,13.8
  text "OFF" at 116.164,8.1 h3 r90
  text "T" at 27.3,4.6 h2.4
  text "R" at 29.8,4.6 h2.4

## Dimensions
117.6,0 to 0,0 on Document
0,41.5 to 0,0 on Document